# Altium PCB NC1-1B-BASIS.PcbDoc (part 4 of 4)
Units mm, origin at the board's own origin, x right, y up, seen from the top; angles counter-clockwise.
Board outline 78 x 78 mm, 4 copper layers (Top Layer, Mid 1 (GND), Mid 2 (PWR), Bottom Layer), stack 1.586 mm thick; 290 components, 134 nets, 819 pads, 380 vias.
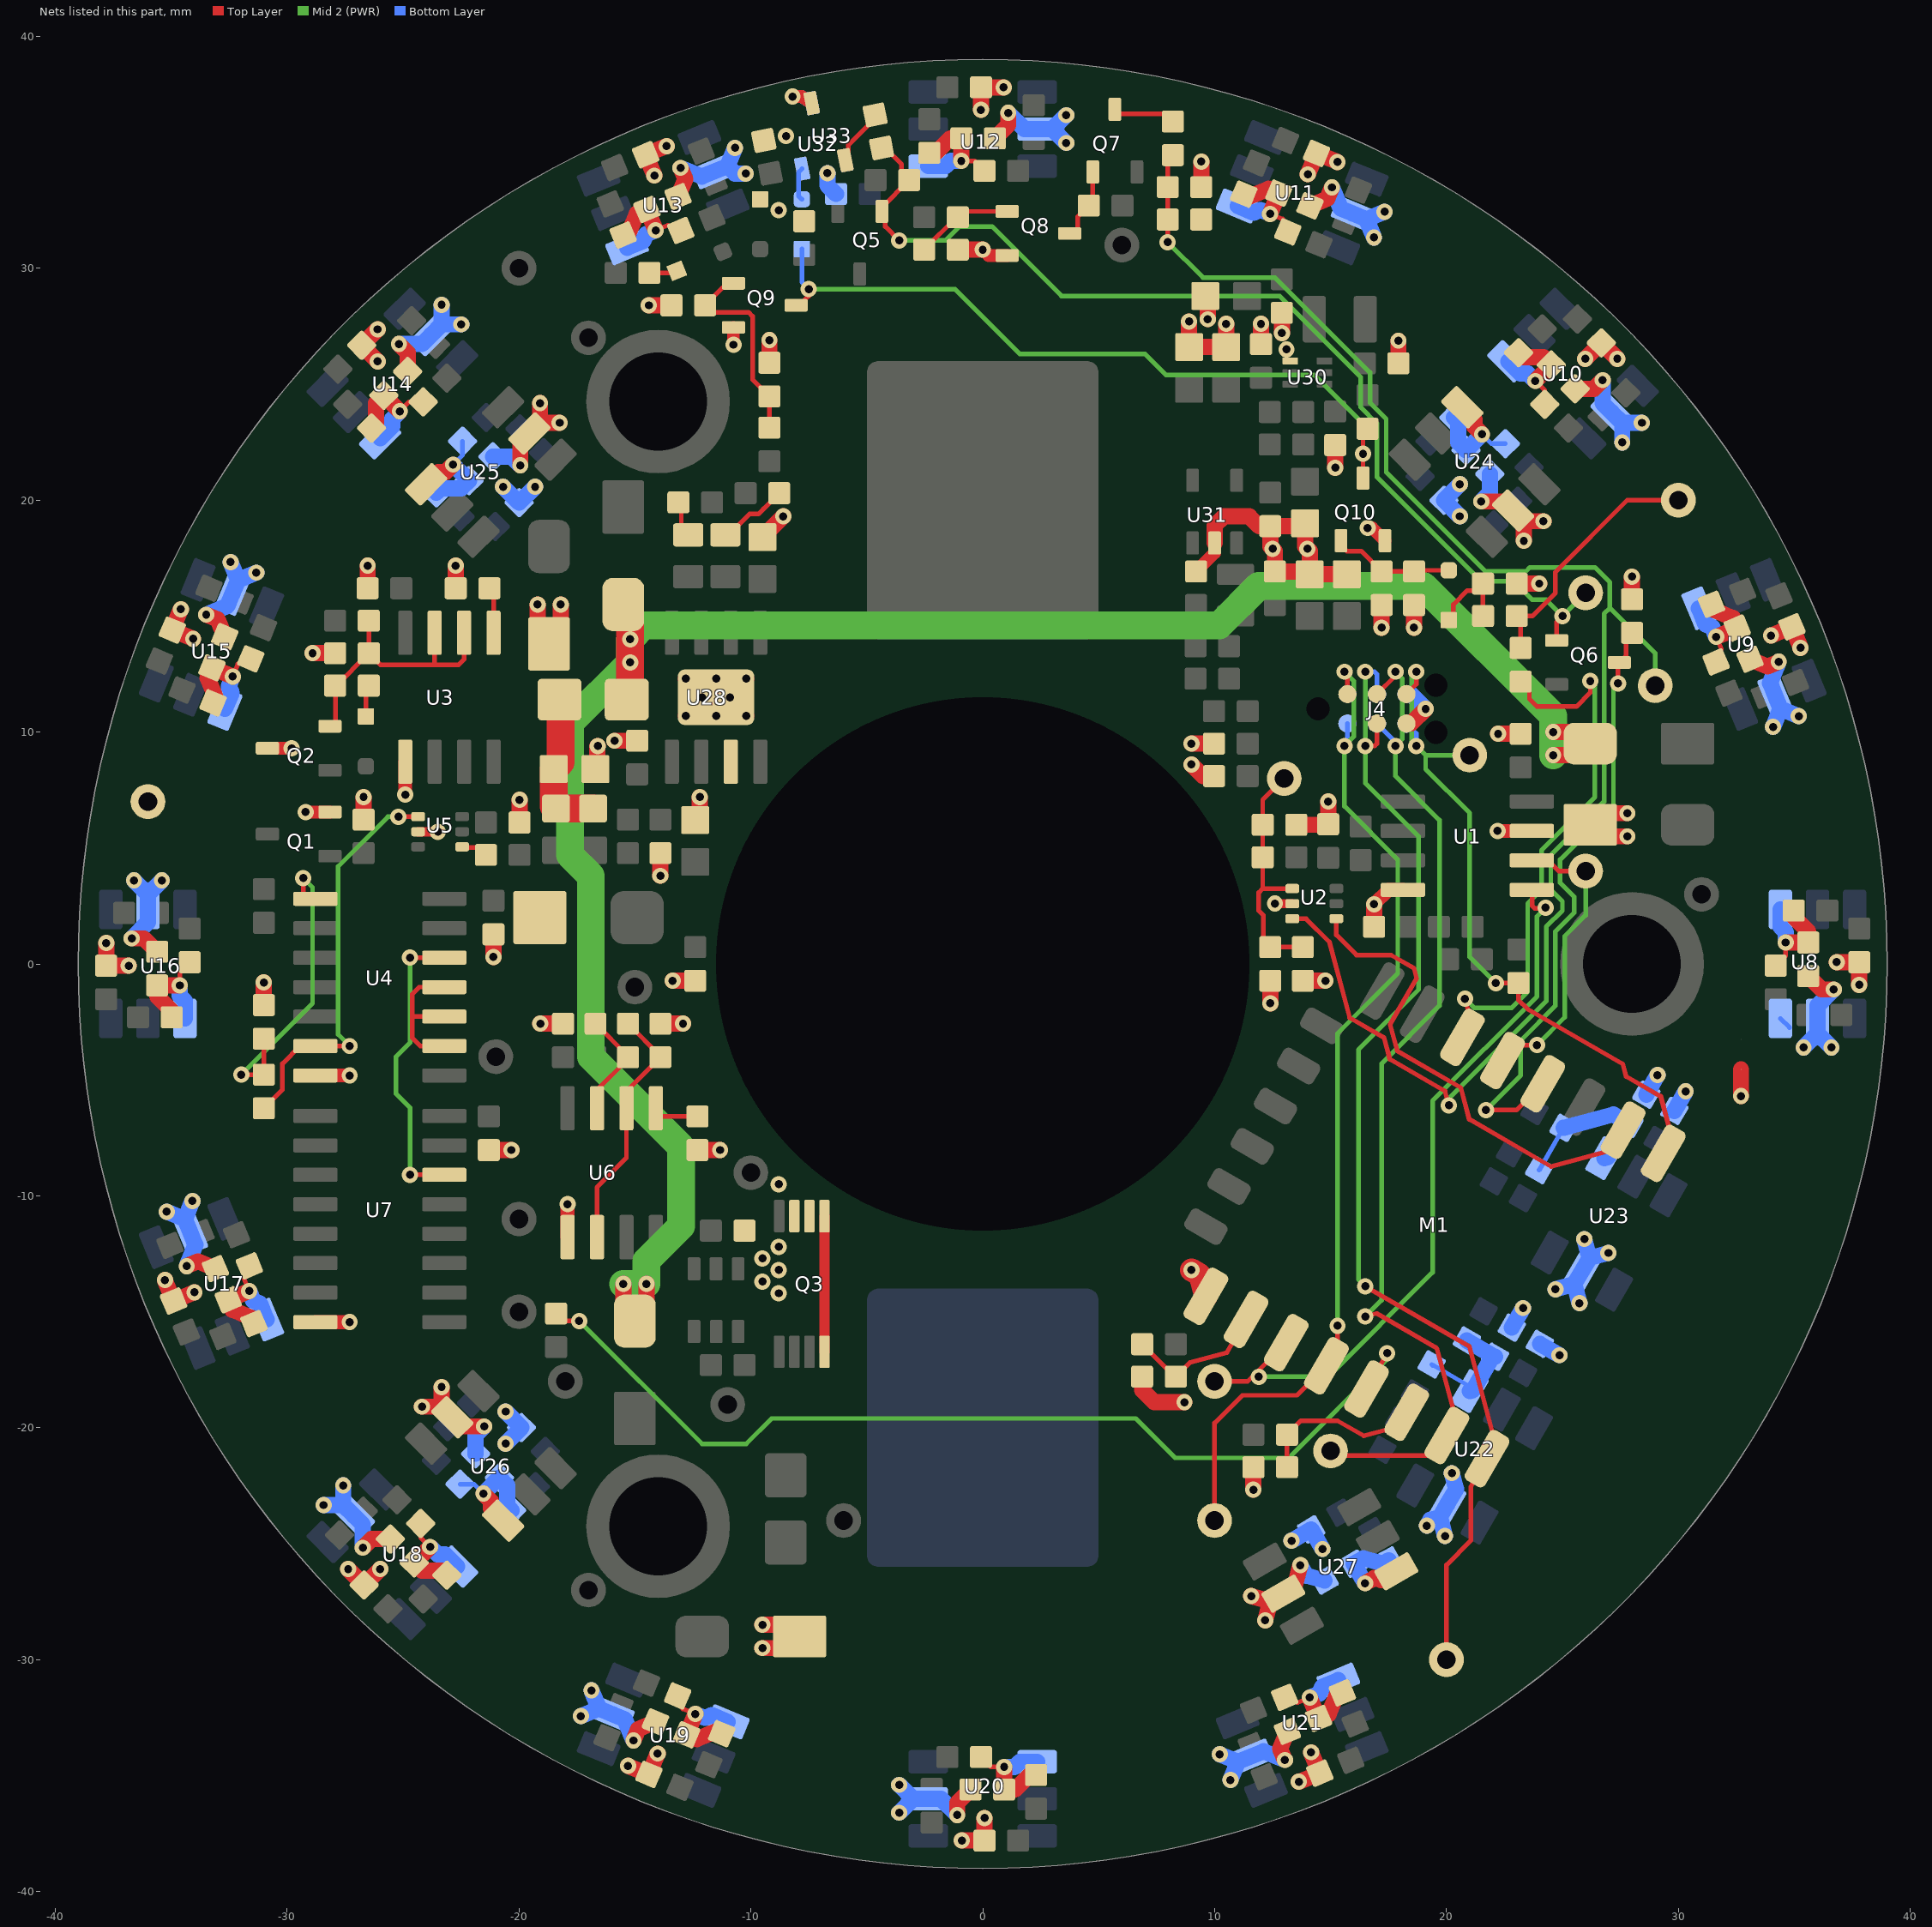
[diagram p5: the nets of this part, all layers, seen from the top]

## Via types
v1: diameter 0.7, hole 0.35, Top Layer to Bottom Layer, tented both sides, 372 vias
v2: diameter 0.7, hole 0.35, Top Layer to Bottom Layer, 8 vias

## Nets (pads, with @x,y where several pads share a name; then routed paths per layer and width w, separated by ;. In a path a pad name is that pad's centre, name@x,y a point inside that pad or via, vN(x,y) a via of type N, cw(c..) or ccw(c..) an arc to the next point about the centre after c; other vN are vias at no path point) (continued)
FS_RESET/: U4.12 U7.14 | length 12.8
  Top Layer w0.2: v1(-24.7,-9.095) U7.14@-23.22,-9.095 ; v1(-24.7,0.27) U4.12@-23.22,0.27
  Mid 2 (PWR) w0.2: v1(-24.7,-9.095) -24.7,-6.2 -25.3,-5.6 -25.3,-4 -24.7,-3.4 v1(-24.7,0.27)
GND: C1.2 C2.2 C3.2 C4.2 C5.2 C6.2 C7.2 C8.2 C9.2 C10.2 C11.2 C12.2 C13.2 C14.2 C15.2 C16.2 C17.2 C18.2 C19.2 C20.2 C21.2 C22.2 C23.2 C24.2 C25.2 C26.2 C27.2 C28.2 C29.2 C30.2 C31.2 C32.2 C33.2 C34.2 C35.2 C36.2 C37.2 C38.2 C39.2 C40.2 C41.2 C42.2 C43.2 C44.2 C45.2 C46.2 C47.2 C48.2 C49.2 C50.2 C51.2 C52.2 C53.2 C54.2 C55.2 C56.2 C59.2 C60.1 C61.1 C63.1 C64.2 C65.2 C66.2 C67.1 C68.1 C69.2 C70.2 C71.2 C72.2 C73.2 C74.2 C76.2 D5.2 D8.2 D9.2 D10.2 D12.2 J4.5 J5.2 M1.15 Q1.2 Q2.3 Q3.2 Q3.3 Q8.2 Q9.2 Q10.2 R4.2 R5.2 R10.2 R11.2 R12.2 R14.2 R15.2 R22.1 R89.2 R90.2 R91.2 R92.2 R97.1 R98.2 R100.2 R103.2 R106.2 R107.2 R109.2 R110.2 R111.2 TP22.1 U1.4 U1.7 U2.2 U3.1@-24.905,8.72 U4.7 U5.2 U6.1@-17.905,-11.78 U7.8 U8.5 U8.6 U9.5 U10.5 U11.5 U12.5 U13.5 U14.5 U15.5 U16.5 U17.5 U18.5 U19.5 U20.5 U21.5 U22.5 U23.5 U24.5 U25.5 U26.5 U27.5 U28.3 U28.EP U30.4 U31.2 U32.3 U33.3 | length 242.7
  Top Layer w0.4: U5.2@-24.35,5.7 v1(-23.5,5.7) ; v1(12.6,2.6) U2.2@13.35,2.6
  Top Layer w0.55: Q2.3@-30.85,9.3 v1(-29.8,9.3) ; v1(-29.2,6.55) Q1.2@-28.15,6.55 ; v1(-10.75,26.7) Q9.2@-10.75,27.45 ; v1(-8.2,37.4) -7.799,37.4 U32.3@-7.384,37.123 ; v1(0,30.8) 0.25,30.55 Q8.2@1.05,30.55 ; R98.2@9.2,16.925 10,17.725 U31.2@10,18.15 ; v1(16.6,18.8) 16.8,18.8 Q10.2@17.35,18.25
  Top Layer w0.6: U7.8@-28.78,-15.445 v1(-27.3,-15.445) ; U4.7@-28.78,-4.81 v1(-27.3,-4.81) ; v1(-24.905,7.3) U3.1@-24.905,8.72 ; U6.1@-17.905,-11.78 v1(-17.905,-10.36) ; v1(16.875,2.575) 17.495,3.195 U1.4@18.12,3.195 ; v1(22.2,5.735) U1.7@23.68,5.735
  Top Layer w0.7: v1(-37.8,0.9) C30.2@-37.8,-0.075 v1(-36.825,-0.075) ; v1(-36.7,1.1) -36.175,1.1 C31.2@-35.6,0.525 ; v1(-35.267,-13.634) C32.2@-34.894,-14.535 v1(-33.993,-14.162) ; v1(-34.578,15.297) C28.2@-34.951,14.396 v1(-34.051,14.023) ; v1(-34.327,-13.028) -33.842,-12.827 C33.2@-33.091,-13.139 ; v1(-33.485,15.061) -33,14.86 C29.2@-32.689,14.109 ; C6.2@-31,-1.775 v1(-31,-0.8) ; v1(-28.9,13.4) C9.2@-27.925,13.4 ; v1(-27.365,-26.092) C34.2@-26.676,-26.782 v1(-25.986,-26.092) ; v1(-26.729,-25.173) -26.357,-24.802 C35.2@-25.544,-24.802 ; R22.1@-26.7,6.225 v1(-26.7,7.2) ; C4.2@-26.525,16.2 v1(-26.525,17.175) ; v1(-26.092,25.986) C26.2@-26.782,26.676 v1(-26.092,27.365) ; v1(-25.173,26.729) -24.802,26.357 C27.2@-24.802,25.544 ; v1(-24.183,-19.092) U26.5@-23.335,-19.092 ; v1(-23.335,-18.243) U26.5@-23.335,-19.092 ; C5.2@-22.725,16.2 v1(-22.725,17.175) ; v1(-21.496,-19.94) -22.486,-19.94 U26.5@-22.875,-19.552 U26.5@-23.335,-19.092 ; C13.2@-21.3,-8.025 v1(-20.325,-8.025) ; v1(-21.1,0.3) C7.2@-21.1,1.275 ; C8.2@-19.975,6.1 v1(-19.975,7.075) ; v1(-19.94,21.496) -19.94,22.486 U25.5@-19.092,23.335 ; v1(-19.2,15.5) -19.2,14.3 D9.2@-18.7,13.8 -18.2,14.3 v1(-18.2,15.5) ; v1(-19.092,24.183) U25.5@-19.092,23.335 ; v1(-19.075,-2.575) C12.2@-18.1,-2.575 ; v1(-18.243,23.335) U25.5@-19.092,23.335 ; C54.2@-16.7,8.4 -16.627,8.473 -16.627,9.373 v1(-16.6,9.4) ; v1(-15.875,9.625) R90.2@-14.9,9.625 ; v1(-15.297,-34.578) C36.2@-14.396,-34.951 v1(-14.023,-34.051) ; v1(-15.061,-33.485) -14.86,-33 C37.2@-14.109,-32.689 ; v1(-14.4,28.4) C74.2@-13.425,28.4 ; v1(-14.162,33.993) C24.2@-14.535,34.894 v1(-13.634,35.267) ; C10.2@-13.9,-2.575 v1(-12.925,-2.575) ; v1(-13.9,3.8) R91.2@-13.9,4.775 ; v1(-13.375,-0.725) R89.2@-12.4,-0.725 ; C25.2@-13.139,33.091 -12.827,33.842 v1(-13.028,34.327) ; v2(-12.8,10.7) U28.EP@-12,11.5 ; v2(-12.8,12.3) U28.EP@-12,11.5 ; C56.2@-12.4,6.2 -12.2,6.4 v1(-12.2,7.2) ; C11.2@-12.3,-8.025 v1(-11.325,-8.025) ; v2(-11.5,10.7) U28.EP@-11.5,11.5 ; v2(-11.5,12.3) U28.EP@-11.5,11.5 ; v2(-10.2,10.7) U28.EP@-11,11.5 ; v2(-10.2,12.3) U28.EP@-11,11.5 ; v1(-9.5,-29.5) -8.4,-29.5 D10.2@-7.9,-29 -8.4,-28.5 v1(-9.5,-28.5) ; C55.2@-9.5,18.4 v1(-8.6,19.3) ; R109.2@-9.2,25.925 v1(-9.2,26.9) ; v1(-1.1,-36.7) -1.1,-36.175 C39.2@-0.525,-35.6 ; R106.2@-1.075,30.8 v1(0,30.8) ; v1(-0.9,-37.8) C38.2@0.075,-37.8 v1(0.075,-36.825) ; v1(-0.075,36.825) C22.2@-0.075,37.8 v1(0.9,37.8) ; C23.2@0.525,35.6 1.1,36.175 v1(1.1,36.7) ; R4.2@6.875,-17.8 6.875,-18.375 7.4,-18.9 v1(8.7,-18.9) ; v1(8.9,27.7) C64.2@8.9,26.6 C65.2@10.5,26.6 v1(10.5,27.6) ; v1(9,8.6) 9.5,8.1 R11.2@9.975,8.1 ; v1(9,9.5) R12.2@9.975,9.5 ; R107.2@9.425,33.5 v1(9.425,34.6) ; C59.2@9.6,28.8 9.7,28.7 v1(9.7,27.8) ; U31.2@10,18.15 10,18.9 10.4,19.3 11.5,19.3 11.925,18.875 C67.1@12.4,18.875 ; v1(11.582,-27.261) U27.5@12.402,-27.481 ; v1(11.675,-22.675) R5.2@11.675,-21.7 ; C63.1@12,26.725 v1(12,27.6) ; v1(12.182,-28.3) U27.5@12.402,-27.481 ; v1(12.4,-1.7) R15.2@12.4,-0.725 ; v1(12.9,27.2) C60.1@12.9,28.075 ; v1(13.028,-34.327) 12.827,-33.842 C41.2@13.139,-33.091 ; C3.2@13.525,6 C2.2@14.875,6 ; v1(13.634,-35.267) C40.2@14.535,-34.894 v1(14.162,-33.993) ; v1(13.697,-25.925) 13.441,-26.881 U27.5@12.965,-27.156 U27.5@12.402,-27.481 ; R14.2@13.8,-0.725 v1(14.775,-0.725) ; v1(14.023,34.051) C20.2@14.396,34.951 v1(15.297,34.578) ; C21.2@14.109,32.689 14.86,33 v1(15.061,33.485) ; C2.2@14.9,6.025 v1(14.9,7) ; v1(15.2,21.4) R97.1@15.2,22.375 ; C70.2@15.7,16.8 C69.2@14.1,16.8 ; R10.2@16.875,1.6 v1(16.875,2.575) ; v1(17.2,14.5) C76.2@17.2,15.475 ; C61.1@17.925,25.9 v1(17.925,26.875) ; J4.5@18.27,10.365 18.465,10.365 v1(19.1,11) ; v1(18.6,14.5) R111.2@18.6,15.475 ; v1(21.496,19.94) 22.486,19.94 U24.5@22.875,19.552 U24.5@23.335,19.092 ; v1(22.225,9.925) C1.2@23.2,9.925 ; R110.2@23.025,16.4 v1(24,16.4) ; v1(23.335,18.243) U24.5@23.335,19.092 ; v1(24.183,19.092) U24.5@23.335,19.092 ; C19.2@25.544,24.802 26.357,24.802 v1(26.729,25.173) ; v1(25.986,26.092) C18.2@26.676,26.782 v1(27.365,26.092) ; v1(27.8,5.5) 26.7,5.5 D8.2@26.2,6 26.7,6.5 v1(27.8,6.5) ; R103.2@28,15.725 v1(28,16.7) ; v1(32.7,-5.7) J5.2@32.7,-4.55 ; C17.2@33.091,13.139 33.842,12.827 v1(34.327,13.028) ; v1(33.993,14.162) C16.2@34.894,14.535 v1(35.267,13.634) ; C15.2@35.6,-0.525 36.175,-1.1 v1(36.7,-1.1) ; v1(36.825,0.075) C14.2@37.8,0.075 v1(37.8,-0.9) ; U28.EP@-12,11.5 U28.EP@-11.5,11.5 ; U28.EP@-11.5,11.5 U28.EP@-11,11.5 ; C67.1@12.4,18.875 12.4,18 v1(12.5,17.9) 12.6,17.8 C68.1@12.6,16.925 13.975,16.925 C69.2@14.1,16.8 ; C67.1@12.4,18.875 12.725,18.875 13.775,18.875 C66.2@13.9,19 13.9,18 v1(14,17.9) 14.1,17.8 C69.2@14.1,16.8
  Top Layer w1: v1(9,-13.2) 9.379,-13.419 M1.15@9.623,-14.332
  Bottom Layer w0.2: U8.6@34.4,-2.35 U8.6@34.792,-2.742
  Bottom Layer w0.55: v1(-8.2,37.4) -7.799,37.4 U33.3@-7.384,37.123
  Bottom Layer w0.7: v1(-36.7,1.1) -36,1.8 U16.5@-36,2.35 U16.5@-36,3 ; v1(-36.6,3.6) U16.5@-36,3 ; v1(-35.4,3.6) U16.5@-36,3 ; v1(-35.192,-10.68) U17.5@-34.408,-11.005 ; v1(-34.327,-13.028) -33.949,-12.114 U17.5@-34.159,-11.605 U17.5@-34.408,-11.005 ; v1(-34.083,-10.221) U17.5@-34.408,-11.005 ; v1(-33.485,15.061) -32.571,15.44 U15.5@-32.36,15.948 U15.5@-32.112,16.548 ; v1(-32.436,17.332) U15.5@-32.112,16.548 ; v1(-31.328,16.873) U15.5@-32.112,16.548 ; v1(-28.426,-23.335) U18.5@-27.577,-23.335 ; v1(-27.577,-22.486) U18.5@-27.577,-23.335 ; v1(-26.729,-25.173) -26.729,-24.183 U18.5@-27.118,-23.794 U18.5@-27.577,-23.335 ; v1(-25.173,26.729) -24.183,26.729 U14.5@-23.794,27.118 U14.5@-23.335,27.577 ; v1(-23.335,28.426) U14.5@-23.335,27.577 ; v1(-22.486,27.577) U14.5@-23.335,27.577 ; C51.2@-21.867,-21.125 -21.867,-20.312 v1(-21.496,-19.94) ; C49.2@-21.125,21.867 -20.312,21.867 v1(-19.94,21.496) ; v1(-20.683,20.577) C48.2@-19.993,19.887 v1(-19.304,20.577) ; v1(-20.577,-20.683) C50.2@-19.887,-19.993 v1(-20.577,-19.304) ; v1(-17.332,-32.436) U19.5@-16.548,-32.112 ; v1(-16.873,-31.328) U19.5@-16.548,-32.112 ; v1(-15.061,-33.485) -15.44,-32.571 U19.5@-15.948,-32.36 U19.5@-16.548,-32.112 ; v1(-13.028,34.327) -12.114,33.949 U13.5@-11.605,34.159 U13.5@-11.005,34.408 ; v1(-10.68,35.192) U13.5@-11.005,34.408 ; v1(-10.221,34.084) -10.681,34.084 U13.5@-11.005,34.408 ; v1(-6.7,34.1) -6.7,33.575 C73.2@-6.325,33.2 ; v1(-3.6,-36.6) U20.5@-3,-36 ; v1(-3.6,-35.4) U20.5@-3,-36 ; v1(-1.1,-36.7) -1.8,-36 U20.5@-2.35,-36 U20.5@-3,-36 ; v1(1.1,36.7) 1.8,36 U12.5@2.35,36 U12.5@3,36 ; v1(3.6,35.4) U12.5@3,36 ; v1(3.6,36.6) U12.5@3,36 ; v1(10.221,-34.083) U21.5@11.005,-34.408 ; v1(10.68,-35.192) U21.5@11.005,-34.408 ; v1(13.028,-34.327) 12.114,-33.949 U21.5@11.605,-34.159 U21.5@11.005,-34.408 ; v1(13.321,-24.872) C53.2@14.165,-24.384 v1(14.652,-25.229) ; v1(13.697,-25.925) 13.96,-26.379 C52.2@14.745,-26.59 ; v1(15.061,33.485) 15.44,32.571 U11.5@15.948,32.36 U11.5@16.548,32.112 ; v1(16.873,31.328) U11.5@16.548,32.112 ; v1(17.332,32.436) U11.5@16.548,32.112 ; J4.5@18.27,11.635 18.465,11.635 v1(19.1,11) ; v1(19.155,-24.223) 19.305,-23.963 U22.5@19.715,-23.853 ; v1(19.934,-24.673) 19.77,-24.058 U22.5@19.715,-23.853 ; v1(20.232,-21.958) 20.415,-22.641 U22.5@20.04,-23.29 U22.5@19.715,-23.853 ; v1(20.577,19.304) C46.2@19.887,19.993 v1(20.577,20.683) ; v1(21.496,19.94) 21.867,20.312 C47.2@21.867,21.125 ; C43.2@22.815,-15.684 v1(23.302,-14.839) ; C42.2@24.027,-16.384 v1(24.872,-16.871) ; v1(24.695,-14.027) U23.5@25.515,-13.807 ; v1(25.734,-14.627) U23.5@25.515,-13.807 ; v1(25.945,-11.862) U23.5@26.165,-12.681 ; v1(26.729,25.173) 26.729,24.183 U10.5@27.118,23.794 U10.5@27.577,23.335 ; v1(26.984,-12.462) U23.5@26.165,-12.681 ; v1(27.577,22.486) U10.5@27.577,23.335 ; v1(28.426,23.335) U10.5@27.577,23.335 ; C45.2@28.615,-5.638 v1(29.102,-4.793) ; C44.2@29.827,-6.338 v1(30.315,-5.493) ; v1(34.083,10.221) U9.5@34.408,11.005 ; v1(34.327,13.028) 33.948,12.114 U9.5@34.159,11.605 U9.5@34.408,11.005 ; v1(35.192,10.68) U9.5@34.408,11.005 ; v1(35.4,-3.6) U8.5@36,-3 ; v1(36.6,-3.6) U8.5@36,-3 ; v1(36.7,-1.1) 36,-1.8 U8.5@36,-2.35 U8.5@36,-3 ; U23.5@25.515,-13.807 U23.5@25.84,-13.244 U23.5@26.165,-12.681
  other v1: -8.8,-14.2 -9.5,-13.7 -8.8,-13.2 -9.5,-12.7 -8.8,-12.2 -8.8,-9.5 13.1,26.5 -8.8,32.5 -8.485,35.701
  other v2: -12.1,11.5 -10.9,11.5
GPIO0: J4.2 M1.18 TP2.1 | length 44.2
  Top Layer w0.2: TP2.1@10,-24 10,-19.8 11.2,-18.6 13.551,-18.6 M1.18@14.82,-17.332 15.3,-16.5 v1(15.3,-15.6) ; v1(15.6,12.6) 15.73,12.47 J4.2@15.73,11.635
  Mid 2 (PWR) w0.2: v1(15.3,-15.6) 15.3,-3 17.9,-0.4 17.9,4.5 15.6,6.8 v1(15.6,9.4) 16,9.8 16,12.2 v1(15.6,12.6)
  Bottom Layer w0.2: v1@15.73,9.67 J4.2@15.73,10.365
GPIO5: M1.20 R2.2 R5.1 | length 7.4
  Top Layer w0.2: R5.1@13.125,-21.7 R2.2@13.125,-20.3 13.725,-19.7 15.3,-19.7 16.43,-20.353 17.926,-19.952 M1.20@18.284,-19.332
GPIO15: M1.16 R1.2 R4.1 | length 6.2
  Top Layer w0.2: R1.2@6.875,-16.4 8.275,-17.8 R4.1@8.325,-17.8 8.941,-17.184 10.532,-16.757 M1.16@11.355,-15.332
HALL: M1.4 Q6.3 R103.1 | length 26.6
  Top Layer w0.2: v1(21.7,-6.3) 23.02,-6.3 M1.4@24.152,-5.168 ; v1(27.4,12.1) 27.4,12.95 Q6.3@27.45,13 27.751,13.301 27.751,14.026 R103.1@28,14.275
  Mid 2 (PWR) w0.2: v1(21.7,-6.3) 23.2,-4.8 23.2,-3.3 24.7,-1.8 24.7,1.4 25.5,2.2 25.5,2.9 24.9,3.5 24.9,4.5 27.2,6.8 27.2,11.9 v1(27.4,12.1)
HALL/: Q5.1@-4.35,32.45 Q6.1@24.75,13.95 R95.2 R96.2 TP23.1 | length 45.8
  Top Layer w0.2: R96.2@-4.359,35.189 -4.213,35.189 -3.5,34.476 -3.5,34.125 R95.2@-3.175,33.8 -4.35,32.625 Q5.1@-4.35,32.45 -4.2,32.3 -4.2,31.8 v1(-3.6,31.2) ; Q6.1@24.75,13.95 24.75,14.75 v1(25,15)
  Mid 2 (PWR) w0.2: v1(-3.6,31.2) -1.6,31.2 -1,31.8 0.4,31.8 3.4,28.8 12.8,28.8 16.3,25.3 16.3,24 17,23.3 17,21 21.5,16.5 22.9,16.5 23.7,15.7 24.3,15.7 v1(25,15) TP23.1@26,16
KILL: C75.1 R9.2 TP5.1 | length 11
  Top Layer w0.2: R9.2@23.2,13.625 23.2,14.825 C75.1@23.025,15 23.7,15 24.7,16 24.7,16.9 27.8,20 TP5.1@30,20
MON: M1.2 U2.4 | length 20.8
  Top Layer w0.2: U2.4@15.25,1.95 15.25,1.25 16.118,0.382 17.612,0.382 18.596,-0.187 18.712,-0.62 17.567,-2.604 17.875,-3.755 20.615,-5.337 20.979,-6.695 24.509,-8.733 27.116,-8.034 M1.2@27.616,-7.168
NetC5_1: C5.1 U3.5 | length 2
  Top Layer w0.2: C5.1@-21.275,16.2 -21.095,16.02 U3.5@-21.095,14.28
NetC6_1: C6.1 R21.2 U4.1@-28.78,2.81 | length 13.7
  Top Layer w0.2: v1(-31.975,-4.775) R21.2@-31,-4.775 C6.1@-31,-3.225 ; v1(-29.3,3.7) -29.3,3 -29.11,2.81 U4.1@-28.78,2.81
  Mid 2 (PWR) w0.2: v1(-31.975,-4.775) -28.9,-1.7 -28.9,3.3 v1(-29.3,3.7)
NetC9_1: C9.1 Q2.2 R19.2 R20.2 U3.6 U3.7 | length 12.3
  Top Layer w0.2: Q2.2@-28.15,10.25 -28.088,10.25 -27.913,10.425 -27.913,11.988 R20.2@-27.925,12 ; R20.2@-27.925,11.95 C9.1@-26.475,13.4 ; R19.2@-26.475,14.8 C9.1@-26.475,13.4 ; U3.7@-23.635,14.28 -23.635,12.9 ; U3.6@-22.365,14.28 -22.365,13.135 -22.6,12.9 -23.635,12.9 ; C9.1@-26.475,13.4 -25.975,12.9 -23.635,12.9
NetC10_1: C10.1 R25.2 U6.2 U6.6 | length 10.9
  Top Layer w0.2: U6.2@-16.635,-11.78 -16.635,-9.635 -15.365,-8.365 U6.6@-15.365,-6.22 -15.365,-5.49 C10.1@-13.9,-4.025 -13.9,-3.975 R25.2@-15.3,-2.575
NetC11_1: C11.1 U6.5 | length 2
  Top Layer w0.2: U6.5@-14.095,-6.22 -14.095,-6.37 -13.89,-6.575 C11.1@-12.3,-6.575
NetC15_1: C15.1 R26.2 R27.1 U8.1@34.4,2.35 | length 5.3
  Top Layer w0.2: R27.1@34.2,-0.075 34.625,0.35 v1(34.625,0.925)
  Top Layer w0.7: v1(34.625,0.925) C15.1@35.6,0.925 35.6,1.4 34.975,2.025 R26.2@34.975,2.3
  Bottom Layer w0.7: U8.1@34.4,2.35 34.4,1.6 34.625,1.375 v1(34.625,0.925)
NetC17_1: C17.1 R29.2 R30.1 U9.1@30.882,15.335 | length 5.3
  Top Layer w0.2: R30.1@31.625,13.018 31.855,13.574 v1(31.635,14.105)
  Top Layer w0.7: R29.2@31.433,15.509 31.538,15.255 32.354,14.917 C17.1@32.536,14.478 v1(31.635,14.105)
  Bottom Layer w0.7: U9.1@30.882,15.335 31.169,14.643 31.463,14.521 v1(31.635,14.105)
NetC19_1: C19.1 R32.2 R33.1 U10.1@22.663,25.986 | length 5.3
  Top Layer w0.2: v1(23.829,25.138) 24.236,24.731 R33.1@24.236,24.13
  Top Layer w0.7: R32.2@23.105,26.357 23.299,26.163 24.183,26.163 C19.1@24.519,25.827 v1(23.829,25.138)
  Bottom Layer w0.7: U10.1@22.663,25.986 23.193,25.456 23.511,25.456 v1(23.829,25.138)
NetC21_1: C21.1 R35.2 R36.1 U11.1@10.993,32.681 | length 5.3
  Top Layer w0.2: v1(12.396,32.343) 12.927,32.123 R36.1@13.157,31.568
  Top Layer w0.7: R35.2@11.259,33.193 11.513,33.088 12.33,33.426 C21.1@12.769,33.244 v1(12.396,32.343)
  Bottom Layer w0.7: U11.1@10.993,32.681 11.686,32.394 11.98,32.516 v1(12.396,32.343)
NetC23_1: C23.1 R38.2 R39.1 U12.1@-2.35,34.4 | length 5.3
  Top Layer w0.2: v1(-0.925,34.625) -0.35,34.625 R39.1@0.075,34.2
  Top Layer w0.7: R38.2@-2.3,34.975 -2.025,34.975 -1.4,35.6 C23.1@-0.925,35.6 v1(-0.925,34.625)
  Bottom Layer w0.7: U12.1@-2.35,34.4 -1.6,34.4 -1.375,34.625 v1(-0.925,34.625)
NetC25_1: C25.1 R41.2 R42.1 U13.1@-15.335,30.882 | length 5.3
  Top Layer w0.2: v1(-14.105,31.635) -13.574,31.855 R42.1@-13.018,31.625
  Top Layer w0.7: R41.2@-15.509,31.433 -15.255,31.538 -14.917,32.354 C25.1@-14.478,32.536 v1(-14.105,31.635)
  Bottom Layer w0.7: U13.1@-15.335,30.882 -14.643,31.169 -14.521,31.463 v1(-14.105,31.635)
NetC27_1: C27.1 R44.2 R45.1 U14.1@-25.986,22.663 | length 5.3
  Top Layer w0.2: v1(-25.138,23.829) -24.731,24.236 R45.1@-24.13,24.236
  Top Layer w0.7: R44.2@-26.357,23.105 -26.163,23.299 -26.163,24.183 C27.1@-25.827,24.519 v1(-25.138,23.829)
  Bottom Layer w0.7: U14.1@-25.986,22.663 -25.456,23.193 -25.456,23.511 v1(-25.138,23.829)
NetC29_1: C29.1 R47.2 R48.1 U15.1@-32.681,10.993 | length 5.3
  Top Layer w0.2: v1(-32.343,12.396) -32.123,12.927 R48.1@-31.568,13.157
  Top Layer w0.7: R47.2@-33.193,11.259 -33.088,11.513 -33.426,12.33 C29.1@-33.244,12.769 v1(-32.343,12.396)
  Bottom Layer w0.7: U15.1@-32.681,10.993 -32.394,11.686 -32.516,11.98 v1(-32.343,12.396)
NetC31_1: C31.1 R50.2 R51.1 U16.1@-34.4,-2.35 | length 5.3
  Top Layer w0.2: v1(-34.625,-0.925) -34.625,-0.35 R51.1@-34.2,0.075
  Top Layer w0.7: R50.2@-34.975,-2.3 -34.975,-2.025 -35.6,-1.4 C31.1@-35.6,-0.925 v1(-34.625,-0.925)
  Bottom Layer w0.7: v1(-34.625,-0.925) -34.625,-1.375 -34.4,-1.6 U16.1@-34.4,-2.35
NetC33_1: C33.1 R53.2 R54.1 U17.1@-30.882,-15.335 | length 5.3
  Top Layer w0.2: v1(-31.635,-14.105) -31.855,-13.574 R54.1@-31.625,-13.018
  Top Layer w0.7: v1(-31.635,-14.105) C33.1@-32.536,-14.478 -32.354,-14.917 -31.538,-15.255 R53.2@-31.433,-15.509
  Bottom Layer w0.7: v1(-31.635,-14.105) -31.463,-14.521 -31.169,-14.643 U17.1@-30.882,-15.335
NetC35_1: C35.1 R56.2 R57.1 U18.1@-22.663,-25.986 | length 5.3
  Top Layer w0.2: R57.1@-24.236,-24.13 -24.236,-24.731 v1(-23.829,-25.138)
  Top Layer w0.7: v1(-23.829,-25.138) C35.1@-24.519,-25.827 -24.183,-26.163 -23.299,-26.163 R56.2@-23.105,-26.357
  Bottom Layer w0.7: v1(-23.829,-25.138) -23.511,-25.456 -23.193,-25.456 U18.1@-22.663,-25.986
NetC37_1: C37.1 R59.2 R60.1 U19.1@-10.993,-32.681 | length 5.3
  Top Layer w0.2: R60.1@-13.157,-31.568 -12.927,-32.123 v1(-12.396,-32.343)
  Top Layer w0.7: v1(-12.396,-32.343) C37.1@-12.769,-33.244 -12.33,-33.426 -11.514,-33.088 R59.2@-11.259,-33.193
  Bottom Layer w0.7: v1(-12.396,-32.343) -11.98,-32.516 -11.686,-32.394 U19.1@-10.993,-32.681
NetC39_1: C39.1 R62.2 R63.1 U20.1@2.35,-34.4 | length 5.3
  Top Layer w0.2: R63.1@-0.075,-34.2 0.35,-34.625 v1(0.925,-34.625)
  Top Layer w0.7: v1(0.925,-34.625) C39.1@0.925,-35.6 1.4,-35.6 2.025,-34.975 R62.2@2.3,-34.975
  Bottom Layer w0.7: v1(0.925,-34.625) 1.375,-34.625 1.6,-34.4 U20.1@2.35,-34.4
NetC41_1: C41.1 R65.2 R66.1 U21.1@15.335,-30.882 | length 5.3
  Top Layer w0.2: R66.1@13.018,-31.625 13.574,-31.855 v1(14.105,-31.635)
  Top Layer w0.7: v1(14.105,-31.635) C41.1@14.478,-32.536 14.917,-32.354 15.255,-31.538 R65.2@15.509,-31.433
  Bottom Layer w0.7: v1(14.105,-31.635) 14.521,-31.463 14.643,-31.169 U21.1@15.335,-30.882
NetC43_1: C43.1 R68.2 R69.1 U22.1@21.004,-18.42 | length 5.4
  Bottom Layer w0.2: R69.1@19.36,-17.268 19.41,-17.318 19.446,-17.318 20.94,-18.181 U22.1@21.004,-18.42
  Bottom Layer w0.7: R68.2@20.877,-16.239 C43.1@22.09,-16.939 21.953,-16.976 21.141,-18.383 U22.1@21.004,-18.42
NetC45_1: C45.1 R71.2 R72.1 U23.1@26.804,-8.374 | length 7
  Bottom Layer w0.2: R72.1@23.995,-8.889 R71.2@25.045,-7.07
  Bottom Layer w0.7: R71.2@25.045,-7.07 27.197,-6.493 C45.1@27.89,-6.893 27.753,-6.93 26.941,-8.337 U23.1@26.804,-8.374
NetC47_1: C47.1 R74.2 R75.1 U24.1@20.683,24.006 | length 5.3
  Top Layer w0.7: U24.1@20.683,24.006 21.213,23.476 21.213,23.158 v1(21.531,22.84)
  Bottom Layer w0.2: v1(21.531,22.84) 21.938,22.433 R75.1@22.539,22.433
  Bottom Layer w0.7: R74.2@20.312,23.564 20.506,23.37 20.506,22.486 C47.1@20.842,22.15 v1(21.531,22.84)
NetC49_1: C49.1 R77.2 R78.1 U25.1@-24.006,20.683 | length 5.3
  Top Layer w0.7: U25.1@-24.006,20.683 -23.476,21.213 -23.158,21.213 v1(-22.84,21.531)
  Bottom Layer w0.2: v1(-22.84,21.531) -22.433,21.938 R78.1@-22.433,22.539
  Bottom Layer w0.7: R77.2@-23.564,20.312 -23.37,20.506 -22.486,20.506 C49.1@-22.15,20.842 v1(-22.84,21.531)
NetC51_1: C51.1 R80.2 R81.1 U26.1@-20.683,-24.006 | length 5.3
  Top Layer w0.7: v1(-21.531,-22.84) -21.213,-23.158 -21.213,-23.476 U26.1@-20.683,-24.006
  Bottom Layer w0.2: R81.1@-22.539,-22.433 -21.938,-22.433 v1(-21.531,-22.84)
  Bottom Layer w0.7: v1(-21.531,-22.84) C51.1@-20.842,-22.15 -20.506,-22.486 -20.506,-23.37 R80.2@-20.312,-23.564
NetC52_1: C52.1 R83.2 U27.1@17.835,-26.191 | length 4.1
  Top Layer w0.7: v1(16.489,-26.709) 16.878,-26.484 17.186,-26.566 U27.1@17.835,-26.191
  Bottom Layer w0.7: v1(16.489,-26.709) C52.1@16.001,-25.865 16.412,-25.627 17.266,-25.856 R83.2@17.504,-25.718
NetC54_1: C54.1 F1.2 R84.1 R85.1 | length 6.5
  Top Layer w1.2: F1.2@-18.25,11.4 -18.25,11.15 -18.2,11.1 -18.2,8.7 C54.1@-18.5,8.4 -18.5,6.8 R84.1@-18.4,6.7 R85.1@-16.8,6.7
NetC74_1: C74.1 Q9.1@-10.75,29.35 R108.2 R109.1 | length 9
  Top Layer w0.2: Q9.1@-10.75,29.35 -10.925,29.175 -11.2,29.175 C74.1@-11.975,28.4 -11.675,28.1 -10.1,28.1 -9.925,27.925 -9.925,25.2 R109.1@-9.2,24.475 R108.2@-9.2,23.125
NetC75_2: C75.2 D14.2 R110.1 | length 3.8
  Top Layer w0.2: D14.2@20.1,14.825 20.3,15.025 20.3,15.5 20.9,16.1 21.275,16.1 R110.1@21.575,16.4 C75.2@21.575,15
NetC76_1: C76.1 D14.1 Q10.1@15.45,18.25 R111.1 | length 5.3
  Top Layer w0.2: Q10.1@15.45,18.25 15.45,18.05 15.7,17.8 16.325,17.8 C76.1@17.2,16.925 R111.1@18.6,16.925 18.65,16.975 D14.1@20.1,16.975
NetD1_2: D1.2 R20.1 | length 1.4
  Top Layer w0.2: D1.2@-26.6,10.675 -26.6,11.875 R20.1@-26.475,12
NetD2_1: D2.1 D3.1 D4.1 F1.1 | length 88.7
  Top Layer w0.7: v1(-15.5,-13.8) -15.5,-14.9 D4.1@-15,-15.4 -14.5,-14.9 v1(-14.5,-13.8) ; v1(24.6,9) 25.7,9 D2.1@26.2,9.5 25.7,10 v1(24.6,10)
  Top Layer w1.2: D3.1@-15.5,15.5 -15.2,15.2 v1(-15.2,14) v1(-15.2,13) -15.2,11.55 F1.1@-15.35,11.4
  Mid 2 (PWR) w1.2: v1(-15.5,-13.8) v1(-14.5,-13.8) -14.5,-12.8 -13,-11.3 -13,-7.9 -16.9,-4 -16.9,3.8 -17.8,4.7 -17.8,10.4 v1(-15.2,13) v1@-15.2,13.897 ; v1(-15.2,14) -14.6,14.6 10.2,14.6 11.9,16.3 19,16.3 24.6,10.7 v1(24.6,10) v1(24.6,9)
NetD6_2: D6.2 R86.2 | length 3.1
  Top Layer w0.2: D6.2@-11.1,18.5 -10.95,18.5 -10.05,19.4 -9.675,19.4 -9.455,19.62 R86.2@-8.775,20.3
NetD7_2: D7.2 R87.2 | length 1.6
  Top Layer w0.2: R87.2@-13.125,19.9 -12.998,19.773 -12.998,18.798 D7.2@-12.7,18.5
NetD11_2: D11.2 R99.1 | length 1.2
  Top Layer w0.2: R99.1@-14.375,29.8 -13.282,29.8 D11.2@-13.193,29.889
NetD13_1: D13.1 U33.2 | length 1.4
  Bottom Layer w0.2: D13.1@-7.8,32.975 -7.946,33.121 -7.946,34.133 U33.2@-7.789,34.289
NetD13_2: D13.2 Q9.3 Q10.3 R104.2 | length 32.7
  Top Layer w0.2: Q9.3@-8.05,28.4 -7.9,28.4 -7.5,28.8 v1(-7.5,29.1) ; Q10.3@16.4,20.95 v1(16.4,22) 16.4,22.875 R104.2@16.6,23.075
  Mid 2 (PWR) w0.2: v1(-7.5,29.1) -1.2,29.1 1.6,26.3 7,26.3 7.9,25.4 14.3,25.4 16.4,23.3 v1(16.4,22)
  Bottom Layer w0.2: D13.2@-7.8,30.825 -7.8,29.4 v1(-7.5,29.1)
NetM1_6: M1.6 R9.1 | length 24.1
  Top Layer w0.2: M1.6@20.687,-3.168 21.07,-2.506 v1(20.8,-1.5) ; R9.1@23.2,12.175 23.575,11.8 23.575,11.425 23.9,11.1 25.6,11.1 26.2,11.7 v1(26.2,12.2)
  Mid 2 (PWR) w0.2: v1(20.8,-1.5) 21.2,-1.9 22.8,-1.9 23.5,-1.2 23.5,2.6 24.1,3.2 24.1,4.9 26.4,7.2 26.4,12 v1(26.2,12.2)
NetM1_19: M1.19 R3.1 | length 43.1
  Top Layer w0.2: R3.1@-18.4,-15.075 -18.075,-15.4 v1(-17.4,-15.4) ; M1.19@16.552,-18.332 v1(17.443,-16.788)
  Mid 2 (PWR) w0.2: v1(-17.4,-15.4) -12.1,-20.7 -10.2,-20.7 -9.1,-19.6 6.6,-19.6 8.3,-21.3 13.2,-21.3 17.443,-17.057 v1(17.443,-16.788)
NetQ3_1: Q3.1@-6.825,-10.875 Q3.8 | length 5.9
  Top Layer w0.45: Q3.8@-6.825,-16.725 Q3.1@-6.825,-10.875
NetQ7_1: Q7.1@4.75,34.15 Q8.3 R102.2 | length 3.2
  Top Layer w0.2: Q8.3@3.75,31.5 3.925,31.5 4.1,31.675 4.1,32.225 R102.2@4.575,32.7 4.75,32.875 Q7.1@4.75,34.15
NetQ7_3: Q7.3 R105.1 | length 2.8
  Top Layer w0.2: Q7.3@5.7,36.85 5.7,36.65 7.875,36.65 R105.1@8.2,36.325
NetQ8_1: Q8.1@1.05,32.45 R101.2 R106.1 | length 4.3
  Top Layer w0.2: R106.1@-2.525,30.8 -1.125,32.2 R101.2@-1.075,32.2 -0.825,32.45 Q8.1@1.05,32.45
NetR21_1: R21.1 U4.6 U5.1@-24.35,6.35 | length 17.8
  Top Layer w0.2: R21.1@-31,-6.225 -30.2,-5.425 -30.2,-4.3 -29.44,-3.54 U4.6@-28.78,-3.54 v1(-27.3,-3.54) ; v1(-25.2,6.35) U5.1@-24.35,6.35
  Mid 2 (PWR) w0.2: v1(-27.3,-3.54) -27.8,-3.04 -27.8,4.2 -25.65,6.35 v1(-25.2,6.35)
NetR23_2: R23.2 R25.1 U6.7 | length 4.3
  Top Layer w0.2: R23.2@-16.7,-2.575 -15.3,-3.975 R25.1@-15.3,-4.025 -15.3,-4.1 -16.635,-5.435 U6.7@-16.635,-5.79
NetR24_1: R24.1 U5.4 | length 1.2
  Top Layer w0.2: U5.4@-22.45,5.05 -22.415,5.015 -21.74,5.015 R24.1@-21.425,4.7
NetR96_1: R96.1 U32.2 | length 2.5
  Top Layer w0.2: U32.2@-5.926,34.66 -5.8,34.786 -5.8,35.3 -4.641,36.459 R96.1@-4.641,36.611
NetU4_9: U4.9 U4.10 U4.11 | length 6.3
  Top Layer w0.2: U4.9@-23.22,-3.54 -24.26,-3.54 -24.6,-3.2 -24.6,-2.27 ; U4.10@-23.22,-2.27 -24.6,-2.27 ; U4.11@-23.22,-1 -24.3,-1 -24.6,-1.3 -24.6,-2.27
RST: J4.6 M1.1 R17.2 TP8.1 | length 31.1
  Top Layer w0.2: J4.6@18.27,11.635 18.7,12.065 v1(18.7,12.6) ; v1(22.125,-0.825) R17.2@23.1,-0.825 23.1,-1.55 23.5,-1.95 27.605,-4.319 27.747,-4.85 29.238,-5.711 29.723,-7.519 M1.1@29.348,-8.168
  Mid 2 (PWR) w0.2: v1(18.7,12.6) 18.5,12.4 18.5,9.6 v1(18.7,9.4) 19.1,9 ; TP8.1@21,9 19.1,9 ; v1(22.125,-0.825) 21,0.3 21,6.5 19.1,8.4 19.1,9
  Bottom Layer w0.2: J4.6@18.27,10.365 18.7,9.935 v1(18.7,9.4)
RXD: J4.4 M1.21 TP7.1 | length 45.8
  Top Layer w0.2: TP7.1@15,-21 15.2,-21.2 19.3,-21.2 19.807,-20.693 M1.21@20.016,-20.332 20.409,-19.651 19.582,-16.567 16.988,-15.069 v1(16.5,-15.2) ; J4.4@17,11.635 17.8,12.435 v1(17.8,12.6)
  Mid 2 (PWR) w0.2: v1(16.5,-15.2) 17.2,-14.5 17.2,-4.3 19.7,-1.8 19.7,6.2 17.8,8.1 v1(17.8,9.4) 18.1,9.7 18.1,12.3 v1(17.8,12.6)
  Bottom Layer w0.2: J4.4@17,10.365 17.8,9.565 v1(17.8,9.4)
SCL: M1.5 TP4.1 U1.6 | length 12.6
  Top Layer w0.2: M1.5@22.42,-4.168 23.088,-3.5 v1(23.9,-3.5) ; U1.6@23.68,4.465 24.383,4.465 24.848,4 TP4.1@26,4
  Mid 2 (PWR) w0.2: v1(23.9,-3.5) 25.1,-2.3 25.1,1.2 26,2.1 TP4.1@26,4
SDA: M1.17 TP3.1 U1.5 | length 32.2
  Top Layer w0.2: TP3.1@10,-18 11.419,-18 M1.17@13.087,-16.332 ; U1.5@23.68,3.195 23.7,3.175 23.7,2.5 23.8,2.4 24.276,2.4 v1(24.276,2.424)
  Mid 2 (PWR) w0.2: v1(11.9,-17.8) 14.9,-17.8 19.4,-13.3 19.4,-5.9 23.9,-1.4 23.9,2.049 v1(24.276,2.424)
TEMP: C3.1 R13.2 R14.1 R15.1 TP9.1 U2.1@13.35,3.25 | length 10.6
  Top Layer w0.2: TP9.1@13,8 12.075,7.075 C3.1@12.075,6 R13.2@12.075,4.6 12.075,3.25 ; U2.1@13.35,3.25 12.075,3.25 ; R14.1@13.8,0.725 R15.1@12.4,0.725 12.1,1.025 12.1,2.1 11.9,2.3 11.9,3.075 12.075,3.25
TXD: J4.3 M1.22 TP6.1 | length 51
  Top Layer w0.2: v1(16.5,-13.9) 20.986,-16.49 22.114,-20.698 M1.22@21.748,-21.332 21.047,-22.546 21.047,-24.87 20,-25.916 TP6.1@20,-30 ; v1(16.5,9.4) 16.9,9.4 17,9.5 J4.3@17,10.365
  Mid 2 (PWR) w0.2: v1(16.5,-13.9) 16.2,-13.6 16.2,-3.7 18.8,-1.1 18.8,5.5 16.5,7.8 v1(16.5,9.4) v1(16.5,12.6)
  Bottom Layer w0.2: v1(16.5,12.6) 16.9,12.6 17,12.5 J4.3@17,11.635
VBAT_MON: C72.1 R105.2 R107.1 TP24.1 U2.3 | length 72.7
  Top Layer w0.2: v1(7.975,31.125) C72.1@7.975,32.1 R107.1@7.975,33.5 7.975,34.65 R105.2@8.2,34.875 ; U2.3@13.35,1.95 13.95,1.95 14.948,0.952 15.825,-2.322 17.306,-3.177 17.556,-4.109 19.934,-5.482 v1(20.1,-6.1)
  Mid 2 (PWR) w0.2: v1(7.975,31.125) 9.5,29.6 12.6,29.6 16.7,25.5 16.7,24.2 17.4,23.5 17.4,21.2 21.664,16.936 23.436,16.936 23.6,17.1 26.4,17.1 27.049,16.451 27.049,15.349 ; v1(20.1,-6.1) 20.1,-5.8 24.3,-1.6 24.3,1.6 25,2.3 25,2.7 24.5,3.2 24.5,4.7 26.8,7 26.8,15.1 27.049,15.349 ; TP24.1@29,12 29,13.398 27.049,15.349
pads on no net: BAT1.M15 J4.M M1.9 M1.10 M1.11 M1.12 M1.13 M1.14 MOUSE1.0 MOUSE2.0 MOUSE3.0 MOUSE4.0 MOUSE5.0 MOUSE6.0 MOUSE7.0 MOUSE8.0 Q1.1@-27.9,4 Q2.1@-27.9,7.7 Q3.1@-6.15,-11.15 Q5.1@-3.7,32.7 Q6.1@24.5,14.6 Q7.1@4.1,33.9 Q8.1@0.8,33.1 Q9.1@-11,30 Q10.1@14.8,18 U1.1@18.4,7.8 U2.1@13.4,3.8 U3.1@-25.7,9 U4.1@-28.5,3.605 U5.1@-24.3,6.9 U6.1@-18.7,-11.5 U7.1 U7.2 U7.3 U7.4 U7.5 U7.6 U7.7 U7.9 U7.12 U7.13 U7.15 U8.1@33.3,2.5 U9.1@29.808,15.053 U10.1@21.779,25.314 U11.1@10.434,31.722 U12.1@-2.5,33.3 U13.1@-15.053,29.808 U14.1@-25.314,21.779 U15.1@-31.722,10.434 U16.1@-33.3,-2.5 U17.1@-29.808,-15.053 U18.1@-21.779,-25.314 U19.1@-10.434,-31.722 U20.1@2.5,-33.3 U21.1@15.053,-29.808 U22.1@20.126,-17.74 U23.1@25.926,-7.694 U24.1@21.355,24.89 U25.1@-24.89,21.355 U26.1@-21.355,-24.89 U27.1@18.515,-27.069 U27.3 U28.1@-14.2,9 U29.1@-9.9,-12.9 U29.4 U30.1@14.7,24.6 U31.1@8.4,17.9 U32.1@-8.3,33.6 U33.1@-5.239,34.542

## Polygon pours and split planes (outlines as drawn)
+3V3 on Mid 2 (PWR) "+3V3_L03_P020" (solid, remove dead copper, pour order 20): 0,38.5 ccw(c0,0) -38.5,0 ccw(c0,0) 0,-38.5 ccw(c0,0) 38.5,0 ccw(c0,0)
+5V2 on Mid 2 (PWR) "+5V2_L03_P011" (solid, remove dead copper, pour order 11): 0,38.5 ccw(c0,0) -38.5,0 ccw(c0,0) 0,-38.5 ccw(c0,0) 38.5,0 ccw(c0,0)
GND on Top Layer "GND_L01_P017" (solid, remove dead copper, pour order 17): 0,38.7 ccw(c0,0) -38.7,0 ccw(c0,0) 0,-38.7 ccw(c0,0) 38.7,0 ccw(c0,0)
GND on Mid 1 (GND) "GND_L02_P014" (solid, remove dead copper, pour order 14): 0,38.5 ccw(c0,0) -38.5,0 ccw(c0,0) 0,-38.5 ccw(c0,0) 38.5,0 ccw(c0,0)
GND on Bottom Layer "GND_L04_P019" (solid, remove dead copper, pour order 19): 0,38.7 ccw(c0,0) -38.7,0 ccw(c0,0) 0,-38.7 ccw(c0,0) 38.7,0 ccw(c0,0)

## Keep-outs
Top Layer:
  lines w0.2: -8,8.7 -8,14 ; -8,15.7 -8,14 ; -8,17.5 -8,26 cw(c-5,26) -5,29 5,29 cw(c5,26) 6.678,28.487 ; -4.3,11 -5,11 cw(c-5,14) -8,14 ; 4.3,11 5,11 ccw(c5,14) 8,14 ; 7.819,27.026 cw(c5,26) 8,26 8,14 ; 8,8.7 8,14
Bottom Layer:
  lines w0.2: -8,-8.7 -8,-14 ; -4.3,-11 -5,-11 ccw(c-5,-14) -8,-14 ; 4.3,-11 5,-11 cw(c5,-14) 8,-14 ; 8,-8.7 8,-14 ; -8,-14 -8,-26 ccw(c-5,-26) -5,-29 5,-29 ccw(c5,-26) 8,-26 8,-14

## Other copper
Top Layer:
  region net GND: -8.9,-11.8 -8.575,-11.8 ccw(c-8.575,-11.575) -8.35,-11.575 -8.35,-10.231 cw(c-8.294,-10.231) -8.294,-10.175 -7.956,-10.175 cw(c-7.956,-10.231) -7.9,-10.231 -7.9,-11.6 ccw(c-7.8,-11.6) -7.8,-11.7 ccw(c-7.8,-11.6) -7.7,-11.6 -7.7,-10.231 cw(c-7.644,-10.231) -7.644,-10.175 -7.306,-10.175 cw(c-7.306,-10.231) -7.25,-10.231 -7.25,-11.796 cw(c-8.104,-11.796) -7.5,-12.4 ccw(c-6.776,-13.124) -7.8,-13.124 -7.8,-13.6 cw(c-8.8,-13.6) -8.8,-14.6 cw(c-8.8,-13.876) -9.312,-14.388 -9.7,-14 cw(c-9.217,-13.517) -9.9,-13.517 -9.9,-12.883 cw(c-9.217,-12.883) -9.7,-12.4 -9.241,-11.941 cw(c-8.9,-12.283) -8.9,-11.8
  region net -VBAT_PROT: -7.653,-22.947 -7.277,-22.572 cw(c-6.5,-23.35) -6.5,-22.25 -5.35,-22.25 ccw(c-5.35,-21.224) -4.624,-21.949 -3.901,-21.226 ccw(c-4.626,-20.5) -3.6,-20.5 -3.6,-19.4 ccw(c-4.626,-19.4) -3.901,-18.674 -4.624,-17.951 ccw(c-5.35,-18.676) -5.35,-17.65 -8.15,-17.65 ccw(c-8.15,-17.85) -8.35,-17.85 -8.35,-19.45 ccw(c-8.15,-19.45) -8.15,-19.65 -5.9,-19.65 cw(c-5.9,-19.95) -5.6,-19.95 cw(c-5.9,-19.95) -5.9,-20.25 -7.846,-20.25 ccw(c-7.846,-21.104) -8.45,-20.5 -8.93,-20.98 cw(c-9.22,-20.69) -9.22,-21.1 ccw(c-9.22,-21.28) -9.347,-21.153 ccw(c-9.22,-21.28) -9.4,-21.28 -9.4,-22.82 ccw(c-9.22,-22.82) -9.22,-23 -7.78,-23 ccw(c-7.78,-22.82)
  region net NetQ3_1: -6.616,-10.191 ccw(c-6.656,-10.231) -6.656,-10.175 -6.994,-10.175 ccw(c-6.994,-10.231) -7.034,-10.191 ccw(c-6.994,-10.231) -7.05,-10.231 -7.05,-11.971 cw(c-7.904,-11.971) -7.3,-12.575 ccw(c-6.696,-13.179) -7.55,-13.179 -7.55,-14.421 ccw(c-6.696,-14.421) -7.3,-15.025 cw(c-7.904,-15.629) -7.05,-15.629 -7.05,-17.369 ccw(c-6.994,-17.369) -7.034,-17.409 ccw(c-6.994,-17.369) -6.994,-17.425 -6.656,-17.425 ccw(c-6.656,-17.369) -6.616,-17.409 -5.794,-16.586 ccw(c-7.59,-14.79) -5.05,-14.79 -5.05,-12.81 ccw(c-7.59,-12.81) -5.794,-11.014
  region net +VBAT: 9.1,29.6 cw(c8.85,29.45) 9.1,29.6 10.4,29.6 cw(c10.4,29.4) 10.6,29.4 10.6,28.984 ccw(c11.684,28.984) 10.918,28.218 ccw(c10.96,28.26) 10.96,28.2 12.04,28.2 ccw(c12.04,28.26) 12.082,28.218 ccw(c12.04,28.26) 12.1,28.26 12.1,28.559 cw(c12.441,28.559) 12.2,28.8 cw(c12.441,28.559) 12.441,28.9 13.259,28.9 ccw(c13.259,29.241) 13.5,29 cw(c13.741,28.759) 13.741,29.1 14.617,29.1 cw(c14.618,28.418) 15.1,28.9 15.317,28.683 cw(c14.636,28.001) 15.6,28 15.6,27.566 cw(c14.236,27.565) 15.2,26.6 14.967,26.367 cw(c14.443,26.892) 14.443,26.15 ccw(c14.443,26.112) 14.405,26.112 14.405,25.887 ccw(c14.443,25.887) 14.443,25.85 15.67,25.85 cw(c15.67,25.52) 16,25.521 ccw(c16.095,25.52) 16.095,25.425 16.855,25.425 ccw(c16.855,25.52) 16.95,25.52 16.95,26.779 cw(c17.021,26.779) 16.971,26.829 ccw(c16.9,26.9) 17,26.9 17,28.7 ccw(c15.5,28.7) 15.5,30.2 12.624,30.2 cw(c12.624,31.224) 11.9,30.5 ccw(c11.176,29.777) 11.176,30.8 8.759,30.8 ccw(c8.758,30.417) 8.488,30.688 8.4,30.6 cw(c7.917,31.083) 7.917,30.4 7.9,30.4 cw(c7.9,30.978) 7.491,30.569 6.53,31.53 ccw(c6,31) 6,31.75 ccw(c6,31) 5.25,31 5.25,30.45 cw(c4.8,30.45) 4.8,30 ccw(c4.8,29.9) 4.7,29.9 4.7,29.4 ccw(c4.8,29.4) 4.8,29.3 6.017,29.3 cw(c6.017,28.617) 6.5,29.1 7.659,27.941 ccw(c8,28.283) 8,27.8 ccw(c8,28.041) 8.171,27.871 8.588,28.288 ccw(c8.076,28.8) 8.8,28.8 8.8,29.4 cw(c9,29.4) 9,29.6
  region net +5V2: 12.883,24.5 13.4,24.5 ccw(c13.4,24.695) 13.595,24.695 13.595,25.112 ccw(c13.557,25.112) 13.557,25.15 12.95,25.15 cw(c12.95,25.4) 12.7,25.4 12.7,25.43 ccw(c12.38,25.43) 12.38,25.75 11.62,25.75 ccw(c11.62,25.655) 11.553,25.722 11.365,25.535 cw(c11.04,25.86) 11.04,25.4 8.36,25.4 ccw(c8.36,25.34) 8.3,25.34 8.3,24.26 ccw(c8.36,24.26) 8.36,24.2 11.04,24.2 ccw(c11.04,24.26) 11.082,24.218 cw(c11.764,23.536) 11.764,24.5 12.883,24.5
  region net GND: 13.557,25.85 ccw(c13.557,25.887) 13.595,25.887 13.595,26.113 ccw(c13.558,26.113) 13.584,26.139 cw(c13.787,26.342) 13.5,26.342 13.5,28.153 ccw(c12.978,28.153) 13.347,28.522 ccw(c13.28,28.455) 13.28,28.55 12.52,28.55 ccw(c12.52,28.455) 12.425,28.455 12.425,28.225 cw(c12.2,28.225) 12.2,28 10.56,28 cw(c10.56,28.26) 10.3,28.26 10.3,29.34 ccw(c10.24,29.34) 10.24,29.4 9.16,29.4 ccw(c9.16,29.34) 9.1,29.34 9.1,28.683 cw(c8.417,28.683) 8.9,28.2 8.625,27.925 ccw(c9.411,27.14) 8.3,27.14 8.3,26.06 ccw(c8.36,26.06) 8.36,26 11.04,26 ccw(c11.04,26.06) 11.082,26.018 11.099,26.034 cw(c11.62,25.513) 11.62,26.25 11.997,26.25 cw(c11.997,24.922) 12.936,25.861 ccw(c12.962,25.887) 12.962,25.85
  region net 5V2_SW: 12.962,25.65 ccw(c12.962,25.612) 12.925,25.612 12.925,25.388 ccw(c12.962,25.388) 12.962,25.35 13.979,25.35 ccw(c13.979,25.571) 14.2,25.571 14.2,26.1 cw(c14.583,26.1) 14.312,26.371 14.771,26.829 ccw(c14.7,26.9) 14.8,26.9 14.8,28.7 ccw(c14.7,28.7) 14.7,28.8 13.9,28.8 ccw(c13.9,28.7) 13.8,28.7 13.8,25.8 cw(c13.65,25.8) 13.65,25.65
  pour cut-out: 0,12 ccw(c0,0) -12,0 ccw(c0,0) 0,-12 ccw(c0,0) 12,0 ccw(c0,0)
Mid 1 (GND):
  region net GND: -13,13 ccw(c-13,12.5) -13.5,12.5 -13.5,10.5 ccw(c-13,10.5) -13,10 -10,10 ccw(c-10,10.5) -9.5,10.5 -9.5,12.5 ccw(c-10,12.5) -10,13
  pour cut-out: 0,12 ccw(c0,0) -12,0 ccw(c0,0) 0,-12 ccw(c0,0) 12,0 ccw(c0,0)
Mid 2 (PWR):
  region net GND: -8.8,-11.8 cw(c-8.8,-12.2) -8.4,-12.2 -8.4,-14.2 cw(c-8.8,-14.2) -8.8,-14.6 -9,-14.6 cw(c-9,-13.7) -9.9,-13.7 -9.9,-12.7 cw(c-9,-12.7) -9,-11.8
  region net GND: -13,13 ccw(c-13,12.5) -13.5,12.5 -13.5,10.5 ccw(c-13,10.5) -13,10 -10,10 ccw(c-10,10.5) -9.5,10.5 -9.5,12.5 ccw(c-10,12.5) -10,13
  pour cut-out: 0,12 ccw(c0,0) -12,0 ccw(c0,0) 0,-12 ccw(c0,0) 12,0 ccw(c0,0)
Bottom Layer:
  region net GND: -13,13 ccw(c-13,12.5) -13.5,12.5 -13.5,10.5 ccw(c-13,10.5) -13,10 -10,10 ccw(c-10,10.5) -9.5,10.5 -9.5,12.5 ccw(c-10,12.5) -10,13
  pour cut-out: 0,12 ccw(c0,0) -12,0 ccw(c0,0) 0,-12 ccw(c0,0) 12,0 ccw(c0,0)

## Silkscreen, mask and mechanical layers (free items; w line width, h text height)
Top Overlay:
  lines w0.2: -30.9,-8 -30.1,-7.2 -30.1,-6.2 -29.6,-5.7 -22.3,-5.7 -21.5,-4.9 ; -22.8,-17 -21.9,-17 -20.7,-15.8 ; -22,-4.9 -21.5,-4.9 ; -21.5,-15.8 -20.7,-15.8 ; -21.5,-5.4 -21.5,-4.9 ; -20.7,-16.6 -20.7,-15.8 ; 30.6,11 30,11.6 ; 30.6,12.2 30,11.6 ; 32.2,9.2 32.2,10.3 30.9,11.6 30,11.6
  text "+5V2" at -21.413,31.026 h1.5
  text "+VBAT" at 6.707,29.92 h1.5
  text "CHG_B" at -22.441,26.345 h1.5
  text "+" at -2.111,25.848 h10
  text "KILL" at 28.693,21.22 h1.5
  text "HALL/" at 24.29,17.12 h1.5
  text "RST" at 21.48,10.225 h1.5 r90
  text "VBAT_MON" at 32.082,9.216 h1.5 r315
  text "TEMP" at 13.882,7.82 h1.5
  text "GND" at -34.819,6.52 h1.5
  text "CHG_A" at 31.323,3.745 h1.5
  text "SCL" at 26.95,3.52 h1.5
  text "+5V_CHG" at -21.996,-1.255 h1.5
  text "FS_DATA" at -36.964,-8.455 h1.5
  text "FS_ACT" at -18.945,-10.003 h1.5 r90
  text "+3V3" at -13.618,-10.574 h1.5
  text ".Author" at -4.184,-15.48 h1.5
  text "DATA" at -16.52,-17.237 h1.5 r90
  text "FS_PULSE" at -29.638,-17.555 h1.5
  text "SDA" at 10.851,-19.18 h1.5
  text "RXD" at 16.073,-21.98 h1.5
  text "GPIO0" at 10.718,-23.68 h1.5
  text "DATA_FS" at -9.768,-25.438 h1.4 r90
  text "CHG_C" at -22.387,-28.355 h1.5
  text "-VBAT" at -5.52,-28.74 h1.5 r90
  text "TXD" at 18.81,-28.78 h1.5
Bottom Overlay:
  text "+5V2" at -16.96,31.268 h2
  text "+VBAT" at 4.7,30.359 h2
  text "CHG_B" at -10.2,27.726 h2
  text "KILL" at 31.29,21.359 h2
  text "HALL/" at 28.3,17.259 h2
  text "VBAT_MON" at 28.198,12.926 h2
  text "GND" at -30.812,6.359 h2
  text "RST" at 22.703,6.359 h2
  text "TEMP" at 15.7,5.159 h2
  text "CHG_A" at 37.1,4.326 h2
  text "SCL" at 24.639,3.359 h2
  text "+5V_CHG" at -16,-0.474 h2
  text "FS_DATA" at -22.484,-4.474 h2
  text "+3V3" at -11.5,-9.632 h2
  text "FS_ACT" at -21.4,-11.474 h2
  text "FS_PULSE" at -9.786,-14.574 h2
  text "SDA" at 12.395,-16.572 h2
  text "DATA" at -12.6,-16.841 h2
  text "RXD" at 16.7,-19.741 h2
  text "GPIO0" at 13.5,-22.641 h2
  text "-VBAT" at -8.641,-27 h2 r270
  text "DATA_FS" at -10.774,-28.027 h2 r270
  text "TXD" at 21.4,-28.741 h2
  text "CHG_C" at -16.5,-29.574 h2
  text "-" at 1.217,-31.319 h10
Board:
  lines w0.1: -35.697,-15.707 cw(c0,0) -35.697,15.707 ; -28.172,-26.969 ccw(c0,0) -26.969,-28.172 ; -28.172,26.969 cw(c0,0) -26.969,28.172 ; -15.707,-35.697 ccw(c0,0) 15.707,-35.697 ; -15.707,35.697 cw(c0,0) 15.707,35.697 ; 26.969,-28.172 ccw(c0,0) 28.172,-26.969 ; 26.969,28.172 cw(c0,0) 28.172,26.969 ; 35.697,-15.707 ccw(c0,0) 35.697,15.707
Dimensions:
  lines w0.2: 25.456,-25.456 0,0 33.26,-13.777
Top Assembly:
  drawing of 183 lines, arcs and shapes, not listed
  text "74HCT1G04" at -36.94,48.359 h2
  text "Connect pins 1 and 2" at -36.3,46.226 h2
  text "0R/0805" at -41.213,24.459 h2
  text "Replace R110 with 1N5819WS or similar" at 35.783,19.388 h2
  text "Cathode" at 23.625,18.72 h1.5
  text "2K2/0805" at 46.186,8.459 h2
  text "2K2/0805" at 45.998,-22.641 h2

## Dimensions
0,0 to 14,0 on Dimensions
27.577,27.577 to 32,-31 on Dimensions

## Text inside footprints (layer, text, board x,y; h text height)
BAT1: Board "CUTOUT" at -10.999,-1.922 h6
?: Top Overlay "JLCJLCJLCJLC" at -4.019,-32.384 h1.2